# EAGLE board SparkFun_9DoF_Sensor_Stick_Panel_v15a (EAGLE 7.5.0), part 1 of 12
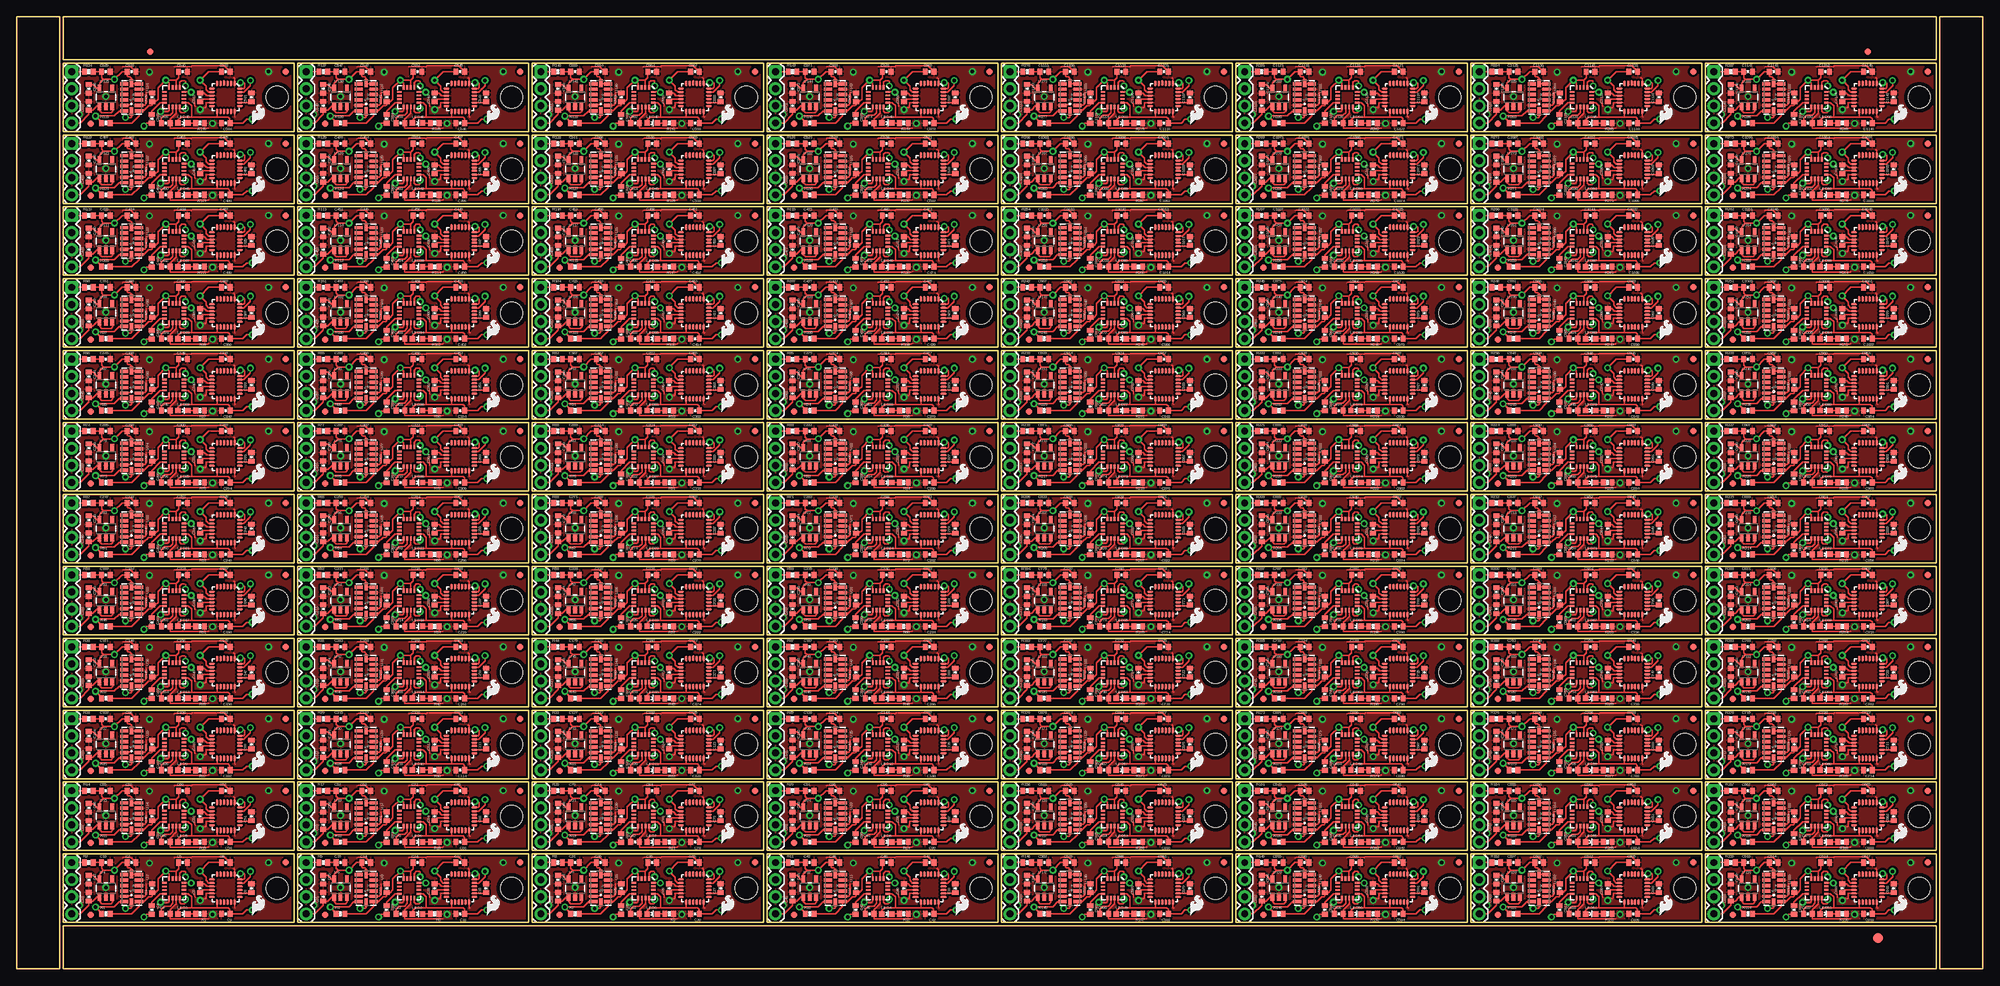
[diagram p0: board, top side]
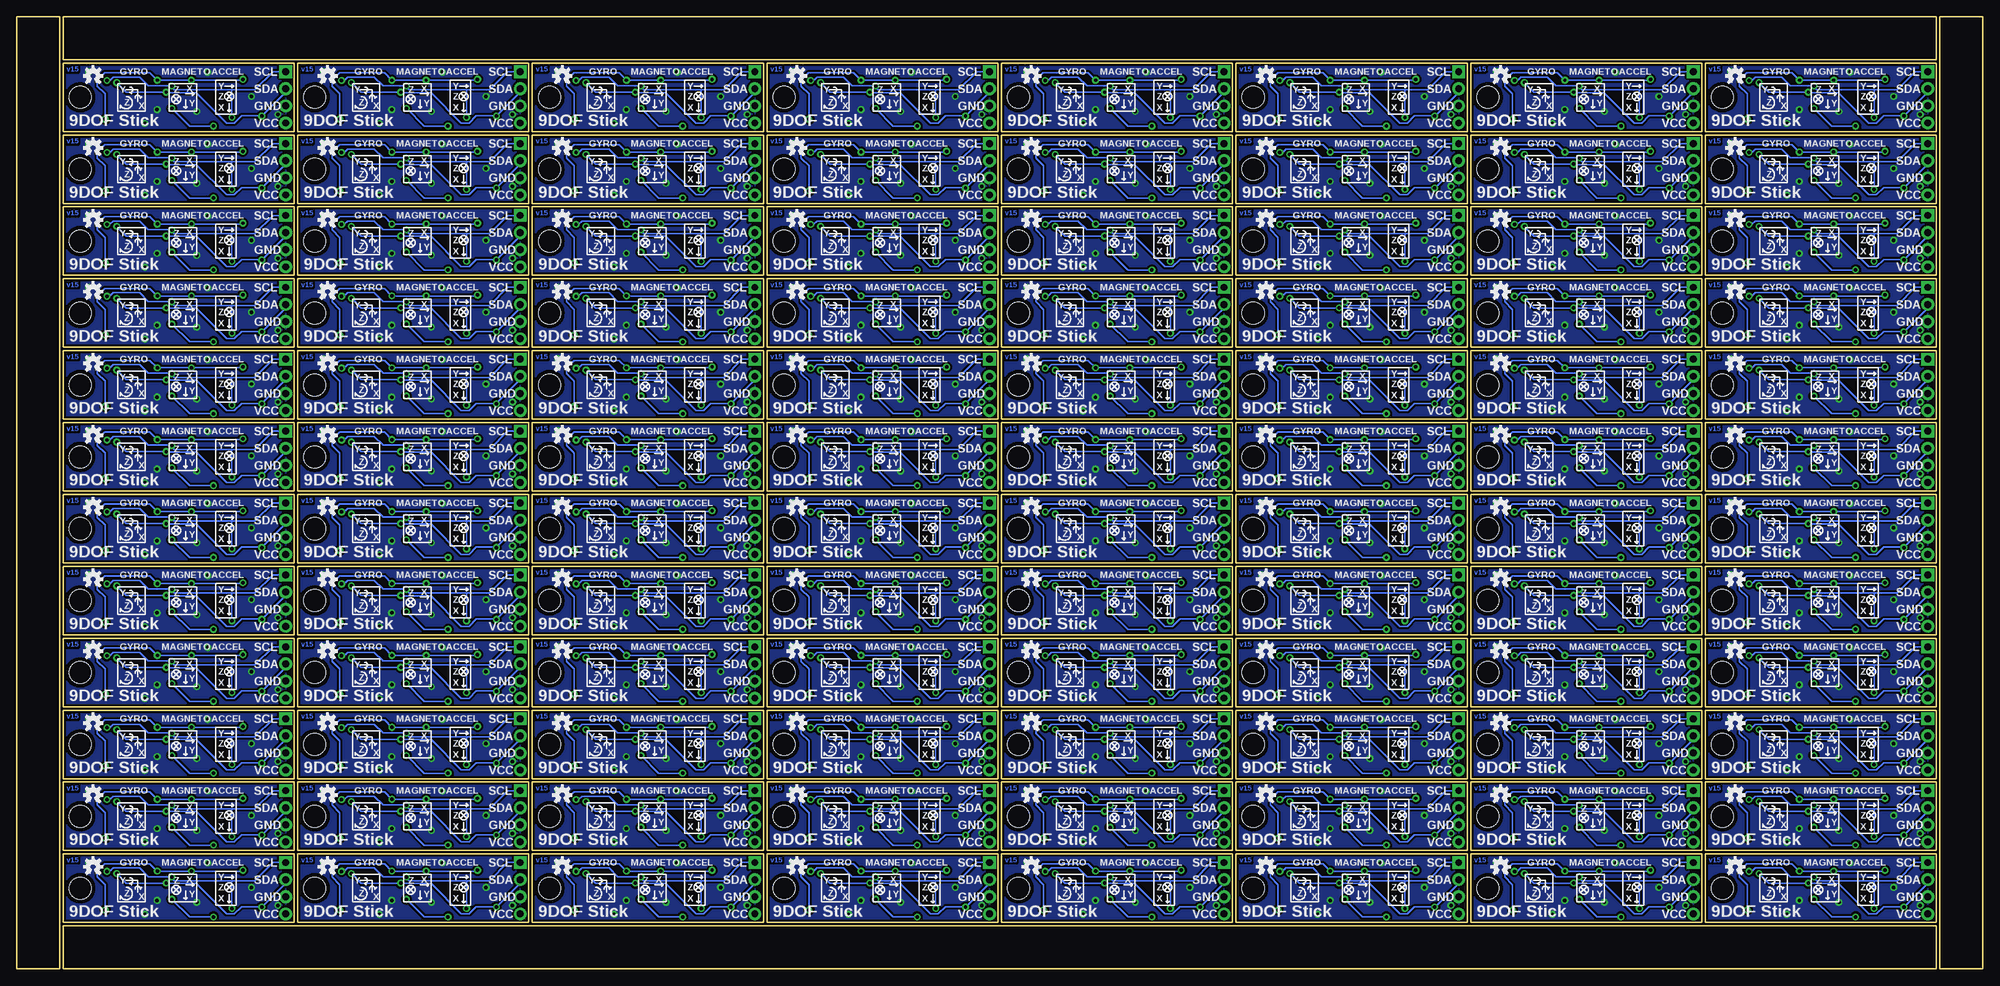
[diagram p1: board, bottom side, seen from below]

Size 291.59 x 141.22 mm. Coordinates in mm from the lower left corner, seen from the top.
Outline: 408 segments
Copper layers (1*16): Top 0.035mm / dielectric 1.5mm / Bottom 0.035mm
Design rules "default": minimum track width 8mil, minimum drill 20mil, track to track 8mil, track to pad 8mil, pad to pad 8mil, via to via 8mil, smd to smd 8mil, copper to edge 8mil, drill to drill 8mil, minimum pad ring 12mil, minimum via ring 10mil, stop-mask expansion 4mil, vias tented up to drill 20mil, thermal gap 10mil
tRestrict: area 32.6,9.8 to 32.7,9.9; area 18,12.7 to 18.2,12.8; area 22.3,10.5 to 22.3,10.5; area 67.4,9.8 to 67.5,9.9; area 52.8,12.7 to 53,12.8; area 57.1,10.5 to 57.1,10.5; area 102.2,9.8 to 102.3,9.9; area 87.6,12.7 to 87.8,12.8; area 91.9,10.5 to 91.9,10.5; area 137,9.8 to 137.1,9.9; area 122.4,12.7 to 122.6,12.8; area 126.7,10.5 to 126.7,10.5; 276 more areas

## Footprints (pad centres in the part's own frame; a part is rotated, then mirrored left to right if it is on the bottom)
0402-CAP = smd 0.7 x 0.9: 1 -0.65,0; 2 0.65,0
FIDUCIAL-1.5X3 = smd 1.5 x 1.5: 1 0,0
FIDUCIAL-1X2 = smd 1 x 1: 1 0,0
1X04 = drill 1.016 pad 1.88 square: 1 0,0 | drill 1.016 pad 1.88: 2 2.54,0; 3 5.08,0; 4 7.62,0
STAND-OFF = hole 3.302: 0,0
LED-0603 = smd 0.8 x 0.8: A 0,-0.75; C 0,0.75
0402-RES = smd 0.7 x 0.9: 1 -0.65,0; 2 0.65,0
QFN-24_1:1 = smd 0.889 x 0.279: 1 -2.076,1.301; 2 -2.076,0.775; 3 -2.076,0.25; 4 -2.102,-0.25; 5 -2.076,-0.775; 6 -2.076,-1.301; 13 2.076,-1.301; 14 2.076,-0.775; 15 2.076,-0.25; 16 2.076,0.25; 17 2.076,0.775; 18 2.076,1.301 | smd 0.279 x 0.889: 7 -1.301,-2.076; 8 -0.775,-2.076; 9 -0.25,-2.076; 10 0.25,-2.076; 11 0.775,-2.076; 12 1.301,-2.076; 19 1.301,2.076; 20 0.775,2.076; 21 0.25,2.076; 22 -0.25,2.076; 23 -0.775,2.076; 24 -1.301,2.076
LGA14 = smd 0.5 x 1.2: 1 2,1.1; 2 1.2,1.1; 3 0.4,1.1; 4 -0.4,1.1; 5 -1.2,1.1; 6 -2,1.1; 8 -2,-1.1; 9 -1.2,-1.1; 10 -0.4,-1.1; 11 0.4,-1.1; 12 1.2,-1.1; 13 2,-1.1 | smd 1.2 x 0.5: 7 -2.1,0; 14 2.1,0
SOT23-5 = smd 0.55 x 1.2: 1 -0.95,-1.3; 2 0,-1.3; 3 0.95,-1.3; 4 0.95,1.3; 5 -0.95,1.3
16LPCC_1:1 = smd 0.65 x 0.28: 1 -1.446,0.801; 2 -1.446,0.25; 3 -1.446,-0.275; 4 -1.446,-0.801; 9 1.446,-0.801; 10 1.446,-0.25; 11 1.446,0.275; 12 1.446,0.801 | smd 0.28 x 0.65: 5 -0.801,-1.446; 6 -0.25,-1.446; 7 0.275,-1.446; 8 0.801,-1.446; 13 0.801,1.446; 14 0.25,1.446; 15 -0.275,1.446; 16 -0.801,1.446

## Placement (x,y rotation side)
C1  0.1uF  [0402-CAP]  20.07,11.94 90 top
C2  0.1uF  [0402-CAP]  17.02,15.75 0 top
C3  4.7uF  [0402-CAP]  22.1,8.13 0 top
C4  0.22uF  [0402-CAP]  20.03,8.74 270 top
C5  0.1uF  [0402-CAP]  24.64,15.75 0 top
C6  2.2nF  [0402-CAP]  34.8,11.94 90 top
C7  0.1uF  [0402-CAP]  27.18,11.94 90 top
C8  10nF  [0402-CAP]  30.99,15.75 0 top
C9  0.1uF  [0402-CAP]  30.99,8.13 180 top
C10  0.1uF  [0402-CAP]  13.21,15.75 0 top
C11  4.7uF  [0402-CAP]  10.67,10.67 90 top
C12  4.7uF  [0402-CAP]  10.67,13.21 270 top
C13  0.1uF  [0402-CAP]  54.86,11.94 90 top
C14  0.1uF  [0402-CAP]  51.82,15.75 0 top
C15  2.2nF  [0402-CAP]  69.6,11.94 90 top
C16  0.1uF  [0402-CAP]  61.98,11.94 90 top
C17  10nF  [0402-CAP]  65.79,15.75 0 top
C18  0.1uF  [0402-CAP]  65.79,8.13 180 top
C19  0.1uF  [0402-CAP]  48.01,15.75 0 top
C20  4.7uF  [0402-CAP]  45.47,13.21 270 top
C21  4.7uF  [0402-CAP]  45.47,10.67 90 top
C22  4.7uF  [0402-CAP]  56.9,8.13 0 top
C23  0.22uF  [0402-CAP]  54.83,8.74 270 top
C24  0.1uF  [0402-CAP]  59.44,15.75 0 top
C25  0.1uF  [0402-CAP]  89.66,11.94 90 top
C26  0.1uF  [0402-CAP]  86.61,15.75 0 top
C27  2.2nF  [0402-CAP]  104.39,11.94 90 top
C28  0.1uF  [0402-CAP]  96.77,11.94 90 top
C29  10nF  [0402-CAP]  100.58,15.75 0 top
C30  0.1uF  [0402-CAP]  100.58,8.13 180 top
C31  0.1uF  [0402-CAP]  82.8,15.75 0 top
C32  4.7uF  [0402-CAP]  80.26,13.21 270 top
C33  4.7uF  [0402-CAP]  80.26,10.67 90 top
C34  4.7uF  [0402-CAP]  91.69,8.13 0 top
C35  0.22uF  [0402-CAP]  89.62,8.74 270 top
C36  0.1uF  [0402-CAP]  94.23,15.75 0 top
C37  0.1uF  [0402-CAP]  124.46,11.94 90 top
C38  0.1uF  [0402-CAP]  121.41,15.75 0 top
C39  2.2nF  [0402-CAP]  139.19,11.94 90 top
C40  0.1uF  [0402-CAP]  131.57,11.94 90 top
C41  10nF  [0402-CAP]  135.38,15.75 0 top
C42  0.1uF  [0402-CAP]  135.38,8.13 180 top
C43  0.1uF  [0402-CAP]  117.6,15.75 0 top
C44  4.7uF  [0402-CAP]  115.06,13.21 270 top
C45  4.7uF  [0402-CAP]  115.06,10.67 90 top
C46  4.7uF  [0402-CAP]  126.49,8.13 0 top
C47  0.22uF  [0402-CAP]  124.42,8.74 270 top
C48  0.1uF  [0402-CAP]  129.03,15.75 0 top
C49  0.1uF  [0402-CAP]  20.07,22.61 90 top
C50  0.1uF  [0402-CAP]  17.02,26.42 0 top
C51  2.2nF  [0402-CAP]  34.8,22.61 90 top
C52  0.1uF  [0402-CAP]  27.18,22.61 90 top
C53  10nF  [0402-CAP]  30.99,26.42 0 top
C54  0.1uF  [0402-CAP]  30.99,18.8 180 top
C55  0.1uF  [0402-CAP]  13.21,26.42 0 top
C56  4.7uF  [0402-CAP]  10.67,23.88 270 top
C57  4.7uF  [0402-CAP]  10.67,21.34 90 top
C58  4.7uF  [0402-CAP]  22.1,18.8 0 top
C59  0.22uF  [0402-CAP]  20.03,19.4 270 top
C60  0.1uF  [0402-CAP]  24.64,26.42 0 top
C61  0.1uF  [0402-CAP]  54.86,22.61 90 top
C62  0.1uF  [0402-CAP]  51.82,26.42 0 top
C63  2.2nF  [0402-CAP]  69.6,22.61 90 top
C64  0.1uF  [0402-CAP]  61.98,22.61 90 top
C65  10nF  [0402-CAP]  65.79,26.42 0 top
C66  0.1uF  [0402-CAP]  65.79,18.8 180 top
C67  0.1uF  [0402-CAP]  48.01,26.42 0 top
C68  4.7uF  [0402-CAP]  45.47,23.88 270 top
C69  4.7uF  [0402-CAP]  45.47,21.34 90 top
C70  4.7uF  [0402-CAP]  56.9,18.8 0 top
C71  0.22uF  [0402-CAP]  54.83,19.4 270 top
C72  0.1uF  [0402-CAP]  59.44,26.42 0 top
C73  0.1uF  [0402-CAP]  89.66,22.61 90 top
C74  0.1uF  [0402-CAP]  86.61,26.42 0 top
C75  2.2nF  [0402-CAP]  104.39,22.61 90 top
C76  0.1uF  [0402-CAP]  96.77,22.61 90 top
C77  10nF  [0402-CAP]  100.58,26.42 0 top
C78  0.1uF  [0402-CAP]  100.58,18.8 180 top
C79  0.1uF  [0402-CAP]  82.8,26.42 0 top
C80  4.7uF  [0402-CAP]  80.26,23.88 270 top
C81  4.7uF  [0402-CAP]  80.26,21.34 90 top
C82  4.7uF  [0402-CAP]  91.69,18.8 0 top
C83  0.22uF  [0402-CAP]  89.62,19.4 270 top
C84  0.1uF  [0402-CAP]  94.23,26.42 0 top
C85  0.1uF  [0402-CAP]  124.46,22.61 90 top
C86  0.1uF  [0402-CAP]  121.41,26.42 0 top
C87  2.2nF  [0402-CAP]  139.19,22.61 90 top
C88  0.1uF  [0402-CAP]  131.57,22.61 90 top
C89  10nF  [0402-CAP]  135.38,26.42 0 top
C90  0.1uF  [0402-CAP]  135.38,18.8 180 top
C91  0.1uF  [0402-CAP]  117.6,26.42 0 top
C92  4.7uF  [0402-CAP]  115.06,23.88 270 top
C93  4.7uF  [0402-CAP]  115.06,21.34 90 top
C94  4.7uF  [0402-CAP]  126.49,18.8 0 top
C95  0.22uF  [0402-CAP]  124.42,19.4 270 top
C96  0.1uF  [0402-CAP]  129.03,26.42 0 top
C97  0.1uF  [0402-CAP]  20.07,33.27 90 top
C98  0.1uF  [0402-CAP]  17.02,37.08 0 top
C99  2.2nF  [0402-CAP]  34.8,33.27 90 top
C100  0.1uF  [0402-CAP]  27.18,33.27 90 top
C101  10nF  [0402-CAP]  30.99,37.08 0 top
C102  0.1uF  [0402-CAP]  30.99,29.46 180 top
C103  0.1uF  [0402-CAP]  13.21,37.08 0 top
C104  4.7uF  [0402-CAP]  10.67,34.54 270 top
C105  4.7uF  [0402-CAP]  10.67,32 90 top
C106  4.7uF  [0402-CAP]  22.1,29.46 0 top
C107  0.22uF  [0402-CAP]  20.03,30.07 270 top
C108  0.1uF  [0402-CAP]  24.64,37.08 0 top
C109  0.1uF  [0402-CAP]  54.86,33.27 90 top
C110  0.1uF  [0402-CAP]  51.82,37.08 0 top
C111  2.2nF  [0402-CAP]  69.6,33.27 90 top
C112  0.1uF  [0402-CAP]  61.98,33.27 90 top
C113  10nF  [0402-CAP]  65.79,37.08 0 top
C114  0.1uF  [0402-CAP]  65.79,29.46 180 top
C115  0.1uF  [0402-CAP]  48.01,37.08 0 top
C116  4.7uF  [0402-CAP]  45.47,34.54 270 top
C117  4.7uF  [0402-CAP]  45.47,32 90 top
C118  4.7uF  [0402-CAP]  56.9,29.46 0 top
C119  0.22uF  [0402-CAP]  54.83,30.07 270 top
C120  0.1uF  [0402-CAP]  59.44,37.08 0 top
C121  0.1uF  [0402-CAP]  89.66,33.27 90 top
C122  0.1uF  [0402-CAP]  86.61,37.08 0 top
C123  2.2nF  [0402-CAP]  104.39,33.27 90 top
C124  0.1uF  [0402-CAP]  96.77,33.27 90 top
C125  10nF  [0402-CAP]  100.58,37.08 0 top
C126  0.1uF  [0402-CAP]  100.58,29.46 180 top
C127  0.1uF  [0402-CAP]  82.8,37.08 0 top
C128  4.7uF  [0402-CAP]  80.26,34.54 270 top
C129  4.7uF  [0402-CAP]  80.26,32 90 top
C130  4.7uF  [0402-CAP]  91.69,29.46 0 top
C131  0.22uF  [0402-CAP]  89.62,30.07 270 top
C132  0.1uF  [0402-CAP]  94.23,37.08 0 top
C133  0.1uF  [0402-CAP]  124.46,33.27 90 top
C134  0.1uF  [0402-CAP]  121.41,37.08 0 top
C135  2.2nF  [0402-CAP]  139.19,33.27 90 top
C136  0.1uF  [0402-CAP]  131.57,33.27 90 top
C137  10nF  [0402-CAP]  135.38,37.08 0 top
C138  0.1uF  [0402-CAP]  135.38,29.46 180 top
C139  0.1uF  [0402-CAP]  117.6,37.08 0 top
C140  4.7uF  [0402-CAP]  115.06,34.54 270 top
C141  4.7uF  [0402-CAP]  115.06,32 90 top
C142  4.7uF  [0402-CAP]  126.49,29.46 0 top
C143  0.22uF  [0402-CAP]  124.42,30.07 270 top
C144  0.1uF  [0402-CAP]  129.03,37.08 0 top
C145  0.1uF  [0402-CAP]  20.07,43.94 90 top
C146  0.1uF  [0402-CAP]  17.02,47.75 0 top
C147  2.2nF  [0402-CAP]  34.8,43.94 90 top
C148  0.1uF  [0402-CAP]  27.18,43.94 90 top
C149  10nF  [0402-CAP]  30.99,47.75 0 top
C150  0.1uF  [0402-CAP]  30.99,40.13 180 top
C151  0.1uF  [0402-CAP]  13.21,47.75 0 top
C152  4.7uF  [0402-CAP]  10.67,45.21 270 top
C153  4.7uF  [0402-CAP]  10.67,42.67 90 top
C154  4.7uF  [0402-CAP]  22.1,40.13 0 top
C155  0.22uF  [0402-CAP]  20.03,40.74 270 top
C156  0.1uF  [0402-CAP]  24.64,47.75 0 top
C157  0.1uF  [0402-CAP]  54.86,43.94 90 top
C158  0.1uF  [0402-CAP]  51.82,47.75 0 top
C159  2.2nF  [0402-CAP]  69.6,43.94 90 top
C160  0.1uF  [0402-CAP]  61.98,43.94 90 top
C161  10nF  [0402-CAP]  65.79,47.75 0 top
C162  0.1uF  [0402-CAP]  65.79,40.13 180 top
C163  0.1uF  [0402-CAP]  48.01,47.75 0 top
C164  4.7uF  [0402-CAP]  45.47,45.21 270 top
C165  4.7uF  [0402-CAP]  45.47,42.67 90 top
C166  4.7uF  [0402-CAP]  56.9,40.13 0 top
C167  0.22uF  [0402-CAP]  54.83,40.74 270 top
C168  0.1uF  [0402-CAP]  59.44,47.75 0 top
C169  0.1uF  [0402-CAP]  89.66,43.94 90 top
C170  0.1uF  [0402-CAP]  86.61,47.75 0 top
C171  2.2nF  [0402-CAP]  104.39,43.94 90 top
C172  0.1uF  [0402-CAP]  96.77,43.94 90 top
C173  10nF  [0402-CAP]  100.58,47.75 0 top
C174  0.1uF  [0402-CAP]  100.58,40.13 180 top
C175  0.1uF  [0402-CAP]  82.8,47.75 0 top
C176  4.7uF  [0402-CAP]  80.26,45.21 270 top
C177  4.7uF  [0402-CAP]  80.26,42.67 90 top
C178  4.7uF  [0402-CAP]  91.69,40.13 0 top
C179  0.22uF  [0402-CAP]  89.62,40.74 270 top
C180  0.1uF  [0402-CAP]  94.23,47.75 0 top
C181  0.1uF  [0402-CAP]  124.46,43.94 90 top
C182  0.1uF  [0402-CAP]  121.41,47.75 0 top
C183  2.2nF  [0402-CAP]  139.19,43.94 90 top
C184  0.1uF  [0402-CAP]  131.57,43.94 90 top
C185  10nF  [0402-CAP]  135.38,47.75 0 top
C186  0.1uF  [0402-CAP]  135.38,40.13 180 top
C187  0.1uF  [0402-CAP]  117.6,47.75 0 top
C188  4.7uF  [0402-CAP]  115.06,45.21 270 top
C189  4.7uF  [0402-CAP]  115.06,42.67 90 top
C190  4.7uF  [0402-CAP]  126.49,40.13 0 top
C191  0.22uF  [0402-CAP]  124.42,40.74 270 top
C192  0.1uF  [0402-CAP]  129.03,47.75 0 top
C193  0.1uF  [0402-CAP]  20.07,54.61 90 top
C194  0.1uF  [0402-CAP]  17.02,58.42 0 top
C195  2.2nF  [0402-CAP]  34.8,54.61 90 top
C196  0.1uF  [0402-CAP]  27.18,54.61 90 top
C197  10nF  [0402-CAP]  30.99,58.42 0 top
C198  0.1uF  [0402-CAP]  30.99,50.8 180 top
C199  0.1uF  [0402-CAP]  13.21,58.42 0 top
C200  4.7uF  [0402-CAP]  10.67,55.88 270 top
C201  4.7uF  [0402-CAP]  10.67,53.34 90 top
C202  4.7uF  [0402-CAP]  22.1,50.8 0 top
C203  0.22uF  [0402-CAP]  20.03,51.41 270 top
C204  0.1uF  [0402-CAP]  24.64,58.42 0 top
C205  0.1uF  [0402-CAP]  54.86,54.61 90 top
C206  0.1uF  [0402-CAP]  51.82,58.42 0 top
C207  2.2nF  [0402-CAP]  69.6,54.61 90 top
C208  0.1uF  [0402-CAP]  61.98,54.61 90 top
C209  10nF  [0402-CAP]  65.79,58.42 0 top
C210  0.1uF  [0402-CAP]  65.79,50.8 180 top
C211  0.1uF  [0402-CAP]  48.01,58.42 0 top
C212  4.7uF  [0402-CAP]  45.47,55.88 270 top
C213  4.7uF  [0402-CAP]  45.47,53.34 90 top
C214  4.7uF  [0402-CAP]  56.9,50.8 0 top
C215  0.22uF  [0402-CAP]  54.83,51.41 270 top
C216  0.1uF  [0402-CAP]  59.44,58.42 0 top
C217  0.1uF  [0402-CAP]  89.66,54.61 90 top
C218  0.1uF  [0402-CAP]  86.61,58.42 0 top
C219  2.2nF  [0402-CAP]  104.39,54.61 90 top
C220  0.1uF  [0402-CAP]  96.77,54.61 90 top
C221  10nF  [0402-CAP]  100.58,58.42 0 top
C222  0.1uF  [0402-CAP]  100.58,50.8 180 top
C223  0.1uF  [0402-CAP]  82.8,58.42 0 top
C224  4.7uF  [0402-CAP]  80.26,55.88 270 top
C225  4.7uF  [0402-CAP]  80.26,53.34 90 top
C226  4.7uF  [0402-CAP]  91.69,50.8 0 top
C227  0.22uF  [0402-CAP]  89.62,51.41 270 top
C228  0.1uF  [0402-CAP]  94.23,58.42 0 top
C229  0.1uF  [0402-CAP]  124.46,54.61 90 top
C230  0.1uF  [0402-CAP]  121.41,58.42 0 top
C231  2.2nF  [0402-CAP]  139.19,54.61 90 top
C232  0.1uF  [0402-CAP]  131.57,54.61 90 top
C233  10nF  [0402-CAP]  135.38,58.42 0 top
C234  0.1uF  [0402-CAP]  135.38,50.8 180 top
C235  0.1uF  [0402-CAP]  117.6,58.42 0 top
C236  4.7uF  [0402-CAP]  115.06,55.88 270 top
C237  4.7uF  [0402-CAP]  115.06,53.34 90 top
C238  4.7uF  [0402-CAP]  126.49,50.8 0 top
C239  0.22uF  [0402-CAP]  124.42,51.41 270 top
C240  0.1uF  [0402-CAP]  129.03,58.42 0 top
C241  0.1uF  [0402-CAP]  20.07,65.28 90 top
C242  0.1uF  [0402-CAP]  17.02,69.09 0 top
C243  2.2nF  [0402-CAP]  34.8,65.28 90 top
C244  0.1uF  [0402-CAP]  27.18,65.28 90 top
C245  10nF  [0402-CAP]  30.99,69.09 0 top
C246  0.1uF  [0402-CAP]  30.99,61.47 180 top
C247  0.1uF  [0402-CAP]  13.21,69.09 0 top
C248  4.7uF  [0402-CAP]  10.67,66.55 270 top
C249  4.7uF  [0402-CAP]  10.67,64.01 90 top
C250  4.7uF  [0402-CAP]  22.1,61.47 0 top
C251  0.22uF  [0402-CAP]  20.03,62.08 270 top
C252  0.1uF  [0402-CAP]  24.64,69.09 0 top
C253  0.1uF  [0402-CAP]  54.86,65.28 90 top
C254  0.1uF  [0402-CAP]  51.82,69.09 0 top
C255  2.2nF  [0402-CAP]  69.6,65.28 90 top
C256  0.1uF  [0402-CAP]  61.98,65.28 90 top
C257  10nF  [0402-CAP]  65.79,69.09 0 top
C258  0.1uF  [0402-CAP]  65.79,61.47 180 top
C259  0.1uF  [0402-CAP]  48.01,69.09 0 top
C260  4.7uF  [0402-CAP]  45.47,66.55 270 top
C261  4.7uF  [0402-CAP]  45.47,64.01 90 top
C262  4.7uF  [0402-CAP]  56.9,61.47 0 top
C263  0.22uF  [0402-CAP]  54.83,62.08 270 top
C264  0.1uF  [0402-CAP]  59.44,69.09 0 top
C265  0.1uF  [0402-CAP]  89.66,65.28 90 top
C266  0.1uF  [0402-CAP]  86.61,69.09 0 top
C267  2.2nF  [0402-CAP]  104.39,65.28 90 top
C268  0.1uF  [0402-CAP]  96.77,65.28 90 top
C269  10nF  [0402-CAP]  100.58,69.09 0 top
C270  0.1uF  [0402-CAP]  100.58,61.47 180 top
C271  0.1uF  [0402-CAP]  82.8,69.09 0 top
C272  4.7uF  [0402-CAP]  80.26,66.55 270 top
C273  4.7uF  [0402-CAP]  80.26,64.01 90 top
C274  4.7uF  [0402-CAP]  91.69,61.47 0 top
C275  0.22uF  [0402-CAP]  89.62,62.08 270 top
C276  0.1uF  [0402-CAP]  94.23,69.09 0 top
C277  0.1uF  [0402-CAP]  124.46,65.28 90 top
C278  0.1uF  [0402-CAP]  121.41,69.09 0 top
C279  2.2nF  [0402-CAP]  139.19,65.28 90 top
C280  0.1uF  [0402-CAP]  131.57,65.28 90 top
C281  10nF  [0402-CAP]  135.38,69.09 0 top
C282  0.1uF  [0402-CAP]  135.38,61.47 180 top
C283  0.1uF  [0402-CAP]  117.6,69.09 0 top
C284  4.7uF  [0402-CAP]  115.06,66.55 270 top
C285  4.7uF  [0402-CAP]  115.06,64.01 90 top
C286  4.7uF  [0402-CAP]  126.49,61.47 0 top
C287  0.22uF  [0402-CAP]  124.42,62.08 270 top
C288  0.1uF  [0402-CAP]  129.03,69.09 0 top
C289  0.1uF  [0402-CAP]  20.07,75.95 90 top
C290  0.1uF  [0402-CAP]  17.02,79.76 0 top
C291  2.2nF  [0402-CAP]  34.8,75.95 90 top
C292  0.1uF  [0402-CAP]  27.18,75.95 90 top
C293  10nF  [0402-CAP]  30.99,79.76 0 top
C294  0.1uF  [0402-CAP]  30.99,72.14 180 top
C295  0.1uF  [0402-CAP]  13.21,79.76 0 top
C296  4.7uF  [0402-CAP]  10.67,77.22 270 top
C297  4.7uF  [0402-CAP]  10.67,74.68 90 top
C298  4.7uF  [0402-CAP]  22.1,72.14 0 top
C299  0.22uF  [0402-CAP]  20.03,72.74 270 top
C300  0.1uF  [0402-CAP]  24.64,79.76 0 top
C301  0.1uF  [0402-CAP]  54.86,75.95 90 top
C302  0.1uF  [0402-CAP]  51.82,79.76 0 top
C303  2.2nF  [0402-CAP]  69.6,75.95 90 top
C304  0.1uF  [0402-CAP]  61.98,75.95 90 top
C305  10nF  [0402-CAP]  65.79,79.76 0 top
C306  0.1uF  [0402-CAP]  65.79,72.14 180 top
C307  0.1uF  [0402-CAP]  48.01,79.76 0 top
C308  4.7uF  [0402-CAP]  45.47,77.22 270 top
C309  4.7uF  [0402-CAP]  45.47,74.68 90 top
C310  4.7uF  [0402-CAP]  56.9,72.14 0 top
C311  0.22uF  [0402-CAP]  54.83,72.74 270 top
C312  0.1uF  [0402-CAP]  59.44,79.76 0 top
C313  0.1uF  [0402-CAP]  89.66,75.95 90 top
C314  0.1uF  [0402-CAP]  86.61,79.76 0 top
C315  2.2nF  [0402-CAP]  104.39,75.95 90 top
C316  0.1uF  [0402-CAP]  96.77,75.95 90 top
C317  10nF  [0402-CAP]  100.58,79.76 0 top
C318  0.1uF  [0402-CAP]  100.58,72.14 180 top
C319  0.1uF  [0402-CAP]  82.8,79.76 0 top
C320  4.7uF  [0402-CAP]  80.26,77.22 270 top
C321  4.7uF  [0402-CAP]  80.26,74.68 90 top
C322  4.7uF  [0402-CAP]  91.69,72.14 0 top
C323  0.22uF  [0402-CAP]  89.62,72.74 270 top
C324  0.1uF  [0402-CAP]  94.23,79.76 0 top
C325  0.1uF  [0402-CAP]  124.46,75.95 90 top
C326  0.1uF  [0402-CAP]  121.41,79.76 0 top
C327  2.2nF  [0402-CAP]  139.19,75.95 90 top
C328  0.1uF  [0402-CAP]  131.57,75.95 90 top
C329  10nF  [0402-CAP]  135.38,79.76 0 top
C330  0.1uF  [0402-CAP]  135.38,72.14 180 top
C331  0.1uF  [0402-CAP]  117.6,79.76 0 top
C332  4.7uF  [0402-CAP]  115.06,77.22 270 top
C333  4.7uF  [0402-CAP]  115.06,74.68 90 top
C334  4.7uF  [0402-CAP]  126.49,72.14 0 top
C335  0.22uF  [0402-CAP]  124.42,72.74 270 top
C336  0.1uF  [0402-CAP]  129.03,79.76 0 top
C337  0.1uF  [0402-CAP]  20.07,86.61 90 top
C338  0.1uF  [0402-CAP]  17.02,90.42 0 top
C339  2.2nF  [0402-CAP]  34.8,86.61 90 top
C340  0.1uF  [0402-CAP]  27.18,86.61 90 top
C341  10nF  [0402-CAP]  30.99,90.42 0 top
C342  0.1uF  [0402-CAP]  30.99,82.8 180 top
C343  0.1uF  [0402-CAP]  13.21,90.42 0 top
C344  4.7uF  [0402-CAP]  10.67,87.88 270 top
C345  4.7uF  [0402-CAP]  10.67,85.34 90 top
C346  4.7uF  [0402-CAP]  22.1,82.8 0 top
C347  0.22uF  [0402-CAP]  20.03,83.41 270 top
C348  0.1uF  [0402-CAP]  24.64,90.42 0 top
C349  0.1uF  [0402-CAP]  54.86,86.61 90 top
C350  0.1uF  [0402-CAP]  51.82,90.42 0 top
C351  2.2nF  [0402-CAP]  69.6,86.61 90 top
C352  0.1uF  [0402-CAP]  61.98,86.61 90 top
C353  10nF  [0402-CAP]  65.79,90.42 0 top
C354  0.1uF  [0402-CAP]  65.79,82.8 180 top
C355  0.1uF  [0402-CAP]  48.01,90.42 0 top
C356  4.7uF  [0402-CAP]  45.47,87.88 270 top
C357  4.7uF  [0402-CAP]  45.47,85.34 90 top
C358  4.7uF  [0402-CAP]  56.9,82.8 0 top
C359  0.22uF  [0402-CAP]  54.83,83.41 270 top
C360  0.1uF  [0402-CAP]  59.44,90.42 0 top
C361  0.1uF  [0402-CAP]  89.66,86.61 90 top
C362  0.1uF  [0402-CAP]  86.61,90.42 0 top
C363  2.2nF  [0402-CAP]  104.39,86.61 90 top
C364  0.1uF  [0402-CAP]  96.77,86.61 90 top
C365  10nF  [0402-CAP]  100.58,90.42 0 top
C366  0.1uF  [0402-CAP]  100.58,82.8 180 top
C367  0.1uF  [0402-CAP]  82.8,90.42 0 top
C368  4.7uF  [0402-CAP]  80.26,87.88 270 top
C369  4.7uF  [0402-CAP]  80.26,85.34 90 top
C370  4.7uF  [0402-CAP]  91.69,82.8 0 top
C371  0.22uF  [0402-CAP]  89.62,83.41 270 top
C372  0.1uF  [0402-CAP]  94.23,90.42 0 top
C373  0.1uF  [0402-CAP]  124.46,86.61 90 top
C374  0.1uF  [0402-CAP]  121.41,90.42 0 top
C375  2.2nF  [0402-CAP]  139.19,86.61 90 top
C376  0.1uF  [0402-CAP]  131.57,86.61 90 top
C377  10nF  [0402-CAP]  135.38,90.42 0 top
C378  0.1uF  [0402-CAP]  135.38,82.8 180 top
C379  0.1uF  [0402-CAP]  117.6,90.42 0 top
C380  4.7uF  [0402-CAP]  115.06,87.88 270 top
C381  4.7uF  [0402-CAP]  115.06,85.34 90 top
C382  4.7uF  [0402-CAP]  126.49,82.8 0 top
C383  0.22uF  [0402-CAP]  124.42,83.41 270 top
C384  0.1uF  [0402-CAP]  129.03,90.42 0 top
C385  0.1uF  [0402-CAP]  20.07,97.28 90 top
C386  0.1uF  [0402-CAP]  17.02,101.09 0 top
C387  2.2nF  [0402-CAP]  34.8,97.28 90 top
C388  0.1uF  [0402-CAP]  27.18,97.28 90 top
C389  10nF  [0402-CAP]  30.99,101.09 0 top
C390  0.1uF  [0402-CAP]  30.99,93.47 180 top
C391  0.1uF  [0402-CAP]  13.21,101.09 0 top
C392  4.7uF  [0402-CAP]  10.67,98.55 270 top
C393  4.7uF  [0402-CAP]  10.67,96.01 90 top
C394  4.7uF  [0402-CAP]  22.1,93.47 0 top
C395  0.22uF  [0402-CAP]  20.03,94.08 270 top
C396  0.1uF  [0402-CAP]  24.64,101.09 0 top
C397  0.1uF  [0402-CAP]  54.86,97.28 90 top
C398  0.1uF  [0402-CAP]  51.82,101.09 0 top
C399  2.2nF  [0402-CAP]  69.6,97.28 90 top
C400  0.1uF  [0402-CAP]  61.98,97.28 90 top
C401  10nF  [0402-CAP]  65.79,101.09 0 top
C402  0.1uF  [0402-CAP]  65.79,93.47 180 top
C403  0.1uF  [0402-CAP]  48.01,101.09 0 top
C404  4.7uF  [0402-CAP]  45.47,98.55 270 top
C405  4.7uF  [0402-CAP]  45.47,96.01 90 top
C406  4.7uF  [0402-CAP]  56.9,93.47 0 top
C407  0.22uF  [0402-CAP]  54.83,94.08 270 top
C408  0.1uF  [0402-CAP]  59.44,101.09 0 top
C409  0.1uF  [0402-CAP]  89.66,97.28 90 top
C410  0.1uF  [0402-CAP]  86.61,101.09 0 top
C411  2.2nF  [0402-CAP]  104.39,97.28 90 top
C412  0.1uF  [0402-CAP]  96.77,97.28 90 top
C413  10nF  [0402-CAP]  100.58,101.09 0 top
C414  0.1uF  [0402-CAP]  100.58,93.47 180 top
C415  0.1uF  [0402-CAP]  82.8,101.09 0 top
C416  4.7uF  [0402-CAP]  80.26,98.55 270 top
C417  4.7uF  [0402-CAP]  80.26,96.01 90 top
C418  4.7uF  [0402-CAP]  91.69,93.47 0 top
C419  0.22uF  [0402-CAP]  89.62,94.08 270 top
C420  0.1uF  [0402-CAP]  94.23,101.09 0 top
C421  0.1uF  [0402-CAP]  124.46,97.28 90 top
C422  0.1uF  [0402-CAP]  121.41,101.09 0 top
C423  2.2nF  [0402-CAP]  139.19,97.28 90 top
C424  0.1uF  [0402-CAP]  131.57,97.28 90 top
C425  10nF  [0402-CAP]  135.38,101.09 0 top
C426  0.1uF  [0402-CAP]  135.38,93.47 180 top
C427  0.1uF  [0402-CAP]  117.6,101.09 0 top
C428  4.7uF  [0402-CAP]  115.06,98.55 270 top
C429  4.7uF  [0402-CAP]  115.06,96.01 90 top
C430  4.7uF  [0402-CAP]  126.49,93.47 0 top
C431  0.22uF  [0402-CAP]  124.42,94.08 270 top
C432  0.1uF  [0402-CAP]  129.03,101.09 0 top
C433  0.1uF  [0402-CAP]  20.07,107.95 90 top
C434  0.1uF  [0402-CAP]  17.02,111.76 0 top
C435  2.2nF  [0402-CAP]  34.8,107.95 90 top
C436  0.1uF  [0402-CAP]  27.18,107.95 90 top
C437  10nF  [0402-CAP]  30.99,111.76 0 top
C438  0.1uF  [0402-CAP]  30.99,104.14 180 top
C439  0.1uF  [0402-CAP]  13.21,111.76 0 top
C440  4.7uF  [0402-CAP]  10.67,109.22 270 top
C441  4.7uF  [0402-CAP]  10.67,106.68 90 top
C442  4.7uF  [0402-CAP]  22.1,104.14 0 top
C443  0.22uF  [0402-CAP]  20.03,104.75 270 top
C444  0.1uF  [0402-CAP]  24.64,111.76 0 top
C445  0.1uF  [0402-CAP]  54.86,107.95 90 top
C446  0.1uF  [0402-CAP]  51.82,111.76 0 top
C447  2.2nF  [0402-CAP]  69.6,107.95 90 top
C448  0.1uF  [0402-CAP]  61.98,107.95 90 top
C449  10nF  [0402-CAP]  65.79,111.76 0 top
C450  0.1uF  [0402-CAP]  65.79,104.14 180 top
C451  0.1uF  [0402-CAP]  48.01,111.76 0 top
C452  4.7uF  [0402-CAP]  45.47,109.22 270 top
C453  4.7uF  [0402-CAP]  45.47,106.68 90 top
C454  4.7uF  [0402-CAP]  56.9,104.14 0 top
C455  0.22uF  [0402-CAP]  54.83,104.75 270 top
C456  0.1uF  [0402-CAP]  59.44,111.76 0 top
C457  0.1uF  [0402-CAP]  89.66,107.95 90 top
C458  0.1uF  [0402-CAP]  86.61,111.76 0 top
C459  2.2nF  [0402-CAP]  104.39,107.95 90 top
C460  0.1uF  [0402-CAP]  96.77,107.95 90 top
C461  10nF  [0402-CAP]  100.58,111.76 0 top
C462  0.1uF  [0402-CAP]  100.58,104.14 180 top
C463  0.1uF  [0402-CAP]  82.8,111.76 0 top
C464  4.7uF  [0402-CAP]  80.26,109.22 270 top
C465  4.7uF  [0402-CAP]  80.26,106.68 90 top
C466  4.7uF  [0402-CAP]  91.69,104.14 0 top
C467  0.22uF  [0402-CAP]  89.62,104.75 270 top
C468  0.1uF  [0402-CAP]  94.23,111.76 0 top
C469  0.1uF  [0402-CAP]  124.46,107.95 90 top
C470  0.1uF  [0402-CAP]  121.41,111.76 0 top
C471  2.2nF  [0402-CAP]  139.19,107.95 90 top
C472  0.1uF  [0402-CAP]  131.57,107.95 90 top
C473  10nF  [0402-CAP]  135.38,111.76 0 top
C474  0.1uF  [0402-CAP]  135.38,104.14 180 top
C475  0.1uF  [0402-CAP]  117.6,111.76 0 top
C476  4.7uF  [0402-CAP]  115.06,109.22 270 top
C477  4.7uF  [0402-CAP]  115.06,106.68 90 top
C478  4.7uF  [0402-CAP]  126.49,104.14 0 top
C479  0.22uF  [0402-CAP]  124.42,104.75 270 top
C480  0.1uF  [0402-CAP]  129.03,111.76 0 top
C481  0.1uF  [0402-CAP]  20.07,118.62 90 top
C482  0.1uF  [0402-CAP]  17.02,122.43 0 top
C483  2.2nF  [0402-CAP]  34.8,118.62 90 top
C484  0.1uF  [0402-CAP]  27.18,118.62 90 top
C485  10nF  [0402-CAP]  30.99,122.43 0 top
C486  0.1uF  [0402-CAP]  30.99,114.81 180 top
C487  0.1uF  [0402-CAP]  13.21,122.43 0 top
C488  4.7uF  [0402-CAP]  10.67,119.89 270 top
C489  4.7uF  [0402-CAP]  10.67,117.35 90 top
C490  4.7uF  [0402-CAP]  22.1,114.81 0 top
C491  0.22uF  [0402-CAP]  20.03,115.42 270 top
C492  0.1uF  [0402-CAP]  24.64,122.43 0 top
C493  0.1uF  [0402-CAP]  54.86,118.62 90 top
C494  0.1uF  [0402-CAP]  51.82,122.43 0 top
C495  2.2nF  [0402-CAP]  69.6,118.62 90 top
C496  0.1uF  [0402-CAP]  61.98,118.62 90 top
C497  10nF  [0402-CAP]  65.79,122.43 0 top
C498  0.1uF  [0402-CAP]  65.79,114.81 180 top
C499  0.1uF  [0402-CAP]  48.01,122.43 0 top
C500  4.7uF  [0402-CAP]  45.47,119.89 270 top
C501  4.7uF  [0402-CAP]  45.47,117.35 90 top
C502  4.7uF  [0402-CAP]  56.9,114.81 0 top
C503  0.22uF  [0402-CAP]  54.83,115.42 270 top
C504  0.1uF  [0402-CAP]  59.44,122.43 0 top
C505  0.1uF  [0402-CAP]  89.66,118.62 90 top
C506  0.1uF  [0402-CAP]  86.61,122.43 0 top
C507  2.2nF  [0402-CAP]  104.39,118.62 90 top
C508  0.1uF  [0402-CAP]  96.77,118.62 90 top
C509  10nF  [0402-CAP]  100.58,122.43 0 top
C510  0.1uF  [0402-CAP]  100.58,114.81 180 top
C511  0.1uF  [0402-CAP]  82.8,122.43 0 top
C512  4.7uF  [0402-CAP]  80.26,119.89 270 top
C513  4.7uF  [0402-CAP]  80.26,117.35 90 top
C514  4.7uF  [0402-CAP]  91.69,114.81 0 top
C515  0.22uF  [0402-CAP]  89.62,115.42 270 top
C516  0.1uF  [0402-CAP]  94.23,122.43 0 top
C517  0.1uF  [0402-CAP]  124.46,118.62 90 top
C518  0.1uF  [0402-CAP]  121.41,122.43 0 top
C519  2.2nF  [0402-CAP]  139.19,118.62 90 top
C520  0.1uF  [0402-CAP]  131.57,118.62 90 top
C521  10nF  [0402-CAP]  135.38,122.43 0 top
C522  0.1uF  [0402-CAP]  135.38,114.81 180 top
C523  0.1uF  [0402-CAP]  117.6,122.43 0 top
C524  4.7uF  [0402-CAP]  115.06,119.89 270 top
C525  4.7uF  [0402-CAP]  115.06,117.35 90 top
C526  4.7uF  [0402-CAP]  126.49,114.81 0 top
C527  0.22uF  [0402-CAP]  124.42,115.42 270 top
C528  0.1uF  [0402-CAP]  129.03,122.43 0 top
C529  0.1uF  [0402-CAP]  20.07,129.29 90 top
C530  0.1uF  [0402-CAP]  17.02,133.1 0 top
C531  2.2nF  [0402-CAP]  34.8,129.29 90 top
C532  0.1uF  [0402-CAP]  27.18,129.29 90 top
C533  10nF  [0402-CAP]  30.99,133.1 0 top
C534  0.1uF  [0402-CAP]  30.99,125.48 180 top
C535  0.1uF  [0402-CAP]  13.21,133.1 0 top
C536  4.7uF  [0402-CAP]  10.67,130.56 270 top
C537  4.7uF  [0402-CAP]  10.67,128.02 90 top
C538  4.7uF  [0402-CAP]  22.1,125.48 0 top
C539  0.22uF  [0402-CAP]  20.03,126.08 270 top
C540  0.1uF  [0402-CAP]  24.64,133.1 0 top
C541  0.1uF  [0402-CAP]  54.86,129.29 90 top
C542  0.1uF  [0402-CAP]  51.82,133.1 0 top
C543  2.2nF  [0402-CAP]  69.6,129.29 90 top
C544  0.1uF  [0402-CAP]  61.98,129.29 90 top
C545  10nF  [0402-CAP]  65.79,133.1 0 top
C546  0.1uF  [0402-CAP]  65.79,125.48 180 top
C547  0.1uF  [0402-CAP]  48.01,133.1 0 top
C548  4.7uF  [0402-CAP]  45.47,130.56 270 top
C549  4.7uF  [0402-CAP]  45.47,128.02 90 top
C550  4.7uF  [0402-CAP]  56.9,125.48 0 top
C551  0.22uF  [0402-CAP]  54.83,126.08 270 top
C552  0.1uF  [0402-CAP]  59.44,133.1 0 top
C553  0.1uF  [0402-CAP]  89.66,129.29 90 top
C554  0.1uF  [0402-CAP]  86.61,133.1 0 top
C555  2.2nF  [0402-CAP]  104.39,129.29 90 top
C556  0.1uF  [0402-CAP]  96.77,129.29 90 top
C557  10nF  [0402-CAP]  100.58,133.1 0 top
C558  0.1uF  [0402-CAP]  100.58,125.48 180 top
C559  0.1uF  [0402-CAP]  82.8,133.1 0 top
C560  4.7uF  [0402-CAP]  80.26,130.56 270 top
C561  4.7uF  [0402-CAP]  80.26,128.02 90 top
C562  4.7uF  [0402-CAP]  91.69,125.48 0 top
C563  0.22uF  [0402-CAP]  89.62,126.08 270 top
C564  0.1uF  [0402-CAP]  94.23,133.1 0 top
C565  0.1uF  [0402-CAP]  124.46,129.29 90 top
C566  0.1uF  [0402-CAP]  121.41,133.1 0 top
C567  2.2nF  [0402-CAP]  139.19,129.29 90 top
C568  0.1uF  [0402-CAP]  131.57,129.29 90 top
C569  10nF  [0402-CAP]  135.38,133.1 0 top
C570  0.1uF  [0402-CAP]  135.38,125.48 180 top
C571  0.1uF  [0402-CAP]  117.6,133.1 0 top
C572  4.7uF  [0402-CAP]  115.06,130.56 270 top
C573  4.7uF  [0402-CAP]  115.06,128.02 90 top
C574  4.7uF  [0402-CAP]  126.49,125.48 0 top
C575  0.22uF  [0402-CAP]  124.42,126.08 270 top
C576  0.1uF  [0402-CAP]  129.03,133.1 0 top
C577  0.1uF  [0402-CAP]  159.26,11.94 90 top
C578  0.1uF  [0402-CAP]  156.21,15.75 0 top
C579  2.2nF  [0402-CAP]  173.99,11.94 90 top
C580  0.1uF  [0402-CAP]  166.37,11.94 90 top
C581  10nF  [0402-CAP]  170.18,15.75 0 top
C582  0.1uF  [0402-CAP]  170.18,8.13 180 top
C583  0.1uF  [0402-CAP]  152.4,15.75 0 top
C584  4.7uF  [0402-CAP]  149.86,13.21 270 top
C585  4.7uF  [0402-CAP]  149.86,10.67 90 top
C586  4.7uF  [0402-CAP]  161.29,8.13 0 top
C587  0.22uF  [0402-CAP]  159.22,8.74 270 top
C588  0.1uF  [0402-CAP]  163.83,15.75 0 top
C589  0.1uF  [0402-CAP]  194.06,11.94 90 top
C590  0.1uF  [0402-CAP]  191.01,15.75 0 top
C591  2.2nF  [0402-CAP]  208.79,11.94 90 top
C592  0.1uF  [0402-CAP]  201.17,11.94 90 top
C593  10nF  [0402-CAP]  204.98,15.75 0 top
C594  0.1uF  [0402-CAP]  204.98,8.13 180 top
C595  0.1uF  [0402-CAP]  187.2,15.75 0 top
C596  4.7uF  [0402-CAP]  184.66,13.21 270 top
C597  4.7uF  [0402-CAP]  184.66,10.67 90 top
C598  4.7uF  [0402-CAP]  196.09,8.13 0 top
C599  0.22uF  [0402-CAP]  194.02,8.74 270 top
C600  0.1uF  [0402-CAP]  198.63,15.75 0 top
C601  0.1uF  [0402-CAP]  228.85,11.94 90 top
C602  0.1uF  [0402-CAP]  225.81,15.75 0 top
C603  2.2nF  [0402-CAP]  243.59,11.94 90 top
C604  0.1uF  [0402-CAP]  235.97,11.94 90 top
C605  10nF  [0402-CAP]  239.78,15.75 0 top
C606  0.1uF  [0402-CAP]  239.78,8.13 180 top
C607  0.1uF  [0402-CAP]  222,15.75 0 top
C608  4.7uF  [0402-CAP]  219.46,13.21 270 top
C609  4.7uF  [0402-CAP]  219.46,10.67 90 top
C610  4.7uF  [0402-CAP]  230.89,8.13 0 top
C611  0.22uF  [0402-CAP]  228.82,8.74 270 top
C612  0.1uF  [0402-CAP]  233.43,15.75 0 top
C613  0.1uF  [0402-CAP]  263.65,11.94 90 top
C614  0.1uF  [0402-CAP]  260.6,15.75 0 top
C615  2.2nF  [0402-CAP]  278.38,11.94 90 top
C616  0.1uF  [0402-CAP]  270.76,11.94 90 top
C617  10nF  [0402-CAP]  274.57,15.75 0 top
C618  0.1uF  [0402-CAP]  274.57,8.13 180 top
C619  0.1uF  [0402-CAP]  256.79,15.75 0 top
C620  4.7uF  [0402-CAP]  254.25,13.21 270 top
C621  4.7uF  [0402-CAP]  254.25,10.67 90 top
C622  4.7uF  [0402-CAP]  265.68,8.13 0 top
C623  0.22uF  [0402-CAP]  263.61,8.74 270 top
C624  0.1uF  [0402-CAP]  268.22,15.75 0 top
C625  0.1uF  [0402-CAP]  159.26,22.61 90 top
C626  0.1uF  [0402-CAP]  156.21,26.42 0 top
C627  2.2nF  [0402-CAP]  173.99,22.61 90 top
C628  0.1uF  [0402-CAP]  166.37,22.61 90 top
C629  10nF  [0402-CAP]  170.18,26.42 0 top
C630  0.1uF  [0402-CAP]  170.18,18.8 180 top
C631  0.1uF  [0402-CAP]  152.4,26.42 0 top
C632  4.7uF  [0402-CAP]  149.86,23.88 270 top
C633  4.7uF  [0402-CAP]  149.86,21.34 90 top
C634  4.7uF  [0402-CAP]  161.29,18.8 0 top
C635  0.22uF  [0402-CAP]  159.22,19.4 270 top
C636  0.1uF  [0402-CAP]  163.83,26.42 0 top
C637  0.1uF  [0402-CAP]  194.06,22.61 90 top
C638  0.1uF  [0402-CAP]  191.01,26.42 0 top
C639  2.2nF  [0402-CAP]  208.79,22.61 90 top
C640  0.1uF  [0402-CAP]  201.17,22.61 90 top
C641  10nF  [0402-CAP]  204.98,26.42 0 top
C642  0.1uF  [0402-CAP]  204.98,18.8 180 top
C643  0.1uF  [0402-CAP]  187.2,26.42 0 top
C644  4.7uF  [0402-CAP]  184.66,23.88 270 top
C645  4.7uF  [0402-CAP]  184.66,21.34 90 top
C646  4.7uF  [0402-CAP]  196.09,18.8 0 top
C647  0.22uF  [0402-CAP]  194.02,19.4 270 top
C648  0.1uF  [0402-CAP]  198.63,26.42 0 top
C649  0.1uF  [0402-CAP]  228.85,22.61 90 top
C650  0.1uF  [0402-CAP]  225.81,26.42 0 top
C651  2.2nF  [0402-CAP]  243.59,22.61 90 top
C652  0.1uF  [0402-CAP]  235.97,22.61 90 top
C653  10nF  [0402-CAP]  239.78,26.42 0 top
C654  0.1uF  [0402-CAP]  239.78,18.8 180 top
C655  0.1uF  [0402-CAP]  222,26.42 0 top
C656  4.7uF  [0402-CAP]  219.46,23.88 270 top
C657  4.7uF  [0402-CAP]  219.46,21.34 90 top
C658  4.7uF  [0402-CAP]  230.89,18.8 0 top
C659  0.22uF  [0402-CAP]  228.82,19.4 270 top
C660  0.1uF  [0402-CAP]  233.43,26.42 0 top
C661  0.1uF  [0402-CAP]  263.65,22.61 90 top
C662  0.1uF  [0402-CAP]  260.6,26.42 0 top
C663  2.2nF  [0402-CAP]  278.38,22.61 90 top
C664  0.1uF  [0402-CAP]  270.76,22.61 90 top
C665  10nF  [0402-CAP]  274.57,26.42 0 top
C666  0.1uF  [0402-CAP]  274.57,18.8 180 top
C667  0.1uF  [0402-CAP]  256.79,26.42 0 top
C668  4.7uF  [0402-CAP]  254.25,23.88 270 top
C669  4.7uF  [0402-CAP]  254.25,21.34 90 top
C670  4.7uF  [0402-CAP]  265.68,18.8 0 top
C671  0.22uF  [0402-CAP]  263.61,19.4 270 top
C672  0.1uF  [0402-CAP]  268.22,26.42 0 top
C673  0.1uF  [0402-CAP]  159.26,33.27 90 top
C674  0.1uF  [0402-CAP]  156.21,37.08 0 top
C675  2.2nF  [0402-CAP]  173.99,33.27 90 top
C676  0.1uF  [0402-CAP]  166.37,33.27 90 top
C677  10nF  [0402-CAP]  170.18,37.08 0 top
C678  0.1uF  [0402-CAP]  170.18,29.46 180 top
C679  0.1uF  [0402-CAP]  152.4,37.08 0 top
C680  4.7uF  [0402-CAP]  149.86,34.54 270 top
C681  4.7uF  [0402-CAP]  149.86,32 90 top
C682  4.7uF  [0402-CAP]  161.29,29.46 0 top
C683  0.22uF  [0402-CAP]  159.22,30.07 270 top
C684  0.1uF  [0402-CAP]  163.83,37.08 0 top
C685  0.1uF  [0402-CAP]  194.06,33.27 90 top
C686  0.1uF  [0402-CAP]  191.01,37.08 0 top
C687  2.2nF  [0402-CAP]  208.79,33.27 90 top
C688  0.1uF  [0402-CAP]  201.17,33.27 90 top
C689  10nF  [0402-CAP]  204.98,37.08 0 top
C690  0.1uF  [0402-CAP]  204.98,29.46 180 top
C691  0.1uF  [0402-CAP]  187.2,37.08 0 top
C692  4.7uF  [0402-CAP]  184.66,34.54 270 top
C693  4.7uF  [0402-CAP]  184.66,32 90 top
C694  4.7uF  [0402-CAP]  196.09,29.46 0 top
C695  0.22uF  [0402-CAP]  194.02,30.07 270 top
C696  0.1uF  [0402-CAP]  198.63,37.08 0 top
C697  0.1uF  [0402-CAP]  228.85,33.27 90 top
C698  0.1uF  [0402-CAP]  225.81,37.08 0 top
C699  2.2nF  [0402-CAP]  243.59,33.27 90 top
C700  0.1uF  [0402-CAP]  235.97,33.27 90 top
C701  10nF  [0402-CAP]  239.78,37.08 0 top
C702  0.1uF  [0402-CAP]  239.78,29.46 180 top
C703  0.1uF  [0402-CAP]  222,37.08 0 top
C704  4.7uF  [0402-CAP]  219.46,34.54 270 top
C705  4.7uF  [0402-CAP]  219.46,32 90 top
C706  4.7uF  [0402-CAP]  230.89,29.46 0 top
C707  0.22uF  [0402-CAP]  228.82,30.07 270 top
C708  0.1uF  [0402-CAP]  233.43,37.08 0 top
C709  0.1uF  [0402-CAP]  263.65,33.27 90 top
C710  0.1uF  [0402-CAP]  260.6,37.08 0 top
C711  2.2nF  [0402-CAP]  278.38,33.27 90 top
C712  0.1uF  [0402-CAP]  270.76,33.27 90 top
C713  10nF  [0402-CAP]  274.57,37.08 0 top
C714  0.1uF  [0402-CAP]  274.57,29.46 180 top
C715  0.1uF  [0402-CAP]  256.79,37.08 0 top
C716  4.7uF  [0402-CAP]  254.25,34.54 270 top
C717  4.7uF  [0402-CAP]  254.25,32 90 top
C718  4.7uF  [0402-CAP]  265.68,29.46 0 top
C719  0.22uF  [0402-CAP]  263.61,30.07 270 top
C720  0.1uF  [0402-CAP]  268.22,37.08 0 top
C721  0.1uF  [0402-CAP]  159.26,43.94 90 top
C722  0.1uF  [0402-CAP]  156.21,47.75 0 top
C723  2.2nF  [0402-CAP]  173.99,43.94 90 top
C724  0.1uF  [0402-CAP]  166.37,43.94 90 top
C725  10nF  [0402-CAP]  170.18,47.75 0 top
C726  0.1uF  [0402-CAP]  170.18,40.13 180 top
C727  0.1uF  [0402-CAP]  152.4,47.75 0 top
C728  4.7uF  [0402-CAP]  149.86,45.21 270 top
C729  4.7uF  [0402-CAP]  149.86,42.67 90 top
C730  4.7uF  [0402-CAP]  161.29,40.13 0 top
C731  0.22uF  [0402-CAP]  159.22,40.74 270 top
C732  0.1uF  [0402-CAP]  163.83,47.75 0 top
C733  0.1uF  [0402-CAP]  194.06,43.94 90 top
C734  0.1uF  [0402-CAP]  191.01,47.75 0 top
C735  2.2nF  [0402-CAP]  208.79,43.94 90 top
C736  0.1uF  [0402-CAP]  201.17,43.94 90 top
C737  10nF  [0402-CAP]  204.98,47.75 0 top
C738  0.1uF  [0402-CAP]  204.98,40.13 180 top
C739  0.1uF  [0402-CAP]  187.2,47.75 0 top
C740  4.7uF  [0402-CAP]  184.66,45.21 270 top
C741  4.7uF  [0402-CAP]  184.66,42.67 90 top
C742  4.7uF  [0402-CAP]  196.09,40.13 0 top
C743  0.22uF  [0402-CAP]  194.02,40.74 270 top
C744  0.1uF  [0402-CAP]  198.63,47.75 0 top
C745  0.1uF  [0402-CAP]  228.85,43.94 90 top
C746  0.1uF  [0402-CAP]  225.81,47.75 0 top
C747  2.2nF  [0402-CAP]  243.59,43.94 90 top
C748  0.1uF  [0402-CAP]  235.97,43.94 90 top
C749  10nF  [0402-CAP]  239.78,47.75 0 top
C750  0.1uF  [0402-CAP]  239.78,40.13 180 top
C751  0.1uF  [0402-CAP]  222,47.75 0 top
C752  4.7uF  [0402-CAP]  219.46,45.21 270 top
C753  4.7uF  [0402-CAP]  219.46,42.67 90 top
C754  4.7uF  [0402-CAP]  230.89,40.13 0 top
C755  0.22uF  [0402-CAP]  228.82,40.74 270 top
C756  0.1uF  [0402-CAP]  233.43,47.75 0 top
C757  0.1uF  [0402-CAP]  263.65,43.94 90 top
C758  0.1uF  [0402-CAP]  260.6,47.75 0 top
C759  2.2nF  [0402-CAP]  278.38,43.94 90 top
C760  0.1uF  [0402-CAP]  270.76,43.94 90 top
C761  10nF  [0402-CAP]  274.57,47.75 0 top
C762  0.1uF  [0402-CAP]  274.57,40.13 180 top
C763  0.1uF  [0402-CAP]  256.79,47.75 0 top
C764  4.7uF  [0402-CAP]  254.25,45.21 270 top
C765  4.7uF  [0402-CAP]  254.25,42.67 90 top
C766  4.7uF  [0402-CAP]  265.68,40.13 0 top
C767  0.22uF  [0402-CAP]  263.61,40.74 270 top
C768  0.1uF  [0402-CAP]  268.22,47.75 0 top
C769  0.1uF  [0402-CAP]  159.26,54.61 90 top
C770  0.1uF  [0402-CAP]  156.21,58.42 0 top
C771  2.2nF  [0402-CAP]  173.99,54.61 90 top
C772  0.1uF  [0402-CAP]  166.37,54.61 90 top
C773  10nF  [0402-CAP]  170.18,58.42 0 top
C774  0.1uF  [0402-CAP]  170.18,50.8 180 top
C775  0.1uF  [0402-CAP]  152.4,58.42 0 top
C776  4.7uF  [0402-CAP]  149.86,55.88 270 top
C777  4.7uF  [0402-CAP]  149.86,53.34 90 top
C778  4.7uF  [0402-CAP]  161.29,50.8 0 top
C779  0.22uF  [0402-CAP]  159.22,51.41 270 top
C780  0.1uF  [0402-CAP]  163.83,58.42 0 top
C781  0.1uF  [0402-CAP]  194.06,54.61 90 top
C782  0.1uF  [0402-CAP]  191.01,58.42 0 top
C783  2.2nF  [0402-CAP]  208.79,54.61 90 top
C784  0.1uF  [0402-CAP]  201.17,54.61 90 top
C785  10nF  [0402-CAP]  204.98,58.42 0 top
C786  0.1uF  [0402-CAP]  204.98,50.8 180 top
C787  0.1uF  [0402-CAP]  187.2,58.42 0 top
C788  4.7uF  [0402-CAP]  184.66,55.88 270 top
C789  4.7uF  [0402-CAP]  184.66,53.34 90 top
C790  4.7uF  [0402-CAP]  196.09,50.8 0 top
C791  0.22uF  [0402-CAP]  194.02,51.41 270 top
C792  0.1uF  [0402-CAP]  198.63,58.42 0 top
C793  0.1uF  [0402-CAP]  228.85,54.61 90 top
C794  0.1uF  [0402-CAP]  225.81,58.42 0 top
C795  2.2nF  [0402-CAP]  243.59,54.61 90 top
C796  0.1uF  [0402-CAP]  235.97,54.61 90 top
C797  10nF  [0402-CAP]  239.78,58.42 0 top
C798  0.1uF  [0402-CAP]  239.78,50.8 180 top
C799  0.1uF  [0402-CAP]  222,58.42 0 top
C800  4.7uF  [0402-CAP]  219.46,55.88 270 top
C801  4.7uF  [0402-CAP]  219.46,53.34 90 top
C802  4.7uF  [0402-CAP]  230.89,50.8 0 top
C803  0.22uF  [0402-CAP]  228.82,51.41 270 top
C804  0.1uF  [0402-CAP]  233.43,58.42 0 top
C805  0.1uF  [0402-CAP]  263.65,54.61 90 top
C806  0.1uF  [0402-CAP]  260.6,58.42 0 top
C807  2.2nF  [0402-CAP]  278.38,54.61 90 top
C808  0.1uF  [0402-CAP]  270.76,54.61 90 top
C809  10nF  [0402-CAP]  274.57,58.42 0 top
C810  0.1uF  [0402-CAP]  274.57,50.8 180 top
C811  0.1uF  [0402-CAP]  256.79,58.42 0 top
C812  4.7uF  [0402-CAP]  254.25,55.88 270 top
C813  4.7uF  [0402-CAP]  254.25,53.34 90 top
C814  4.7uF  [0402-CAP]  265.68,50.8 0 top
C815  0.22uF  [0402-CAP]  263.61,51.41 270 top
C816  0.1uF  [0402-CAP]  268.22,58.42 0 top
C817  0.1uF  [0402-CAP]  159.26,65.28 90 top
C818  0.1uF  [0402-CAP]  156.21,69.09 0 top
C819  2.2nF  [0402-CAP]  173.99,65.28 90 top
C820  0.1uF  [0402-CAP]  166.37,65.28 90 top
C821  10nF  [0402-CAP]  170.18,69.09 0 top
C822  0.1uF  [0402-CAP]  170.18,61.47 180 top
C823  0.1uF  [0402-CAP]  152.4,69.09 0 top
C824  4.7uF  [0402-CAP]  149.86,66.55 270 top
C825  4.7uF  [0402-CAP]  149.86,64.01 90 top
C826  4.7uF  [0402-CAP]  161.29,61.47 0 top
C827  0.22uF  [0402-CAP]  159.22,62.08 270 top
C828  0.1uF  [0402-CAP]  163.83,69.09 0 top
C829  0.1uF  [0402-CAP]  194.06,65.28 90 top
C830  0.1uF  [0402-CAP]  191.01,69.09 0 top
C831  2.2nF  [0402-CAP]  208.79,65.28 90 top
C832  0.1uF  [0402-CAP]  201.17,65.28 90 top
C833  10nF  [0402-CAP]  204.98,69.09 0 top
C834  0.1uF  [0402-CAP]  204.98,61.47 180 top
C835  0.1uF  [0402-CAP]  187.2,69.09 0 top
C836  4.7uF  [0402-CAP]  184.66,66.55 270 top
C837  4.7uF  [0402-CAP]  184.66,64.01 90 top
C838  4.7uF  [0402-CAP]  196.09,61.47 0 top
C839  0.22uF  [0402-CAP]  194.02,62.08 270 top
C840  0.1uF  [0402-CAP]  198.63,69.09 0 top
C841  0.1uF  [0402-CAP]  228.85,65.28 90 top
C842  0.1uF  [0402-CAP]  225.81,69.09 0 top
C843  2.2nF  [0402-CAP]  243.59,65.28 90 top
C844  0.1uF  [0402-CAP]  235.97,65.28 90 top
C845  10nF  [0402-CAP]  239.78,69.09 0 top
C846  0.1uF  [0402-CAP]  239.78,61.47 180 top
C847  0.1uF  [0402-CAP]  222,69.09 0 top
C848  4.7uF  [0402-CAP]  219.46,66.55 270 top
C849  4.7uF  [0402-CAP]  219.46,64.01 90 top
C850  4.7uF  [0402-CAP]  230.89,61.47 0 top
C851  0.22uF  [0402-CAP]  228.82,62.08 270 top
C852  0.1uF  [0402-CAP]  233.43,69.09 0 top
C853  0.1uF  [0402-CAP]  263.65,65.28 90 top
C854  0.1uF  [0402-CAP]  260.6,69.09 0 top
C855  2.2nF  [0402-CAP]  278.38,65.28 90 top
C856  0.1uF  [0402-CAP]  270.76,65.28 90 top
C857  10nF  [0402-CAP]  274.57,69.09 0 top
C858  0.1uF  [0402-CAP]  274.57,61.47 180 top
C859  0.1uF  [0402-CAP]  256.79,69.09 0 top
C860  4.7uF  [0402-CAP]  254.25,66.55 270 top
C861  4.7uF  [0402-CAP]  254.25,64.01 90 top
C862  4.7uF  [0402-CAP]  265.68,61.47 0 top
C863  0.22uF  [0402-CAP]  263.61,62.08 270 top
C864  0.1uF  [0402-CAP]  268.22,69.09 0 top
C865  0.1uF  [0402-CAP]  159.26,75.95 90 top
C866  0.1uF  [0402-CAP]  156.21,79.76 0 top
C867  2.2nF  [0402-CAP]  173.99,75.95 90 top
C868  0.1uF  [0402-CAP]  166.37,75.95 90 top
C869  10nF  [0402-CAP]  170.18,79.76 0 top
C870  0.1uF  [0402-CAP]  170.18,72.14 180 top
C871  0.1uF  [0402-CAP]  152.4,79.76 0 top
C872  4.7uF  [0402-CAP]  149.86,77.22 270 top
C873  4.7uF  [0402-CAP]  149.86,74.68 90 top
C874  4.7uF  [0402-CAP]  161.29,72.14 0 top
C875  0.22uF  [0402-CAP]  159.22,72.74 270 top
C876  0.1uF  [0402-CAP]  163.83,79.76 0 top
C877  0.1uF  [0402-CAP]  194.06,75.95 90 top
C878  0.1uF  [0402-CAP]  191.01,79.76 0 top
C879  2.2nF  [0402-CAP]  208.79,75.95 90 top
C880  0.1uF  [0402-CAP]  201.17,75.95 90 top
C881  10nF  [0402-CAP]  204.98,79.76 0 top
C882  0.1uF  [0402-CAP]  204.98,72.14 180 top
C883  0.1uF  [0402-CAP]  187.2,79.76 0 top
C884  4.7uF  [0402-CAP]  184.66,77.22 270 top
C885  4.7uF  [0402-CAP]  184.66,74.68 90 top
C886  4.7uF  [0402-CAP]  196.09,72.14 0 top
C887  0.22uF  [0402-CAP]  194.02,72.74 270 top
C888  0.1uF  [0402-CAP]  198.63,79.76 0 top
C889  0.1uF  [0402-CAP]  228.85,75.95 90 top
C890  0.1uF  [0402-CAP]  225.81,79.76 0 top
C891  2.2nF  [0402-CAP]  243.59,75.95 90 top
C892  0.1uF  [0402-CAP]  235.97,75.95 90 top
C893  10nF  [0402-CAP]  239.78,79.76 0 top
C894  0.1uF  [0402-CAP]  239.78,72.14 180 top
C895  0.1uF  [0402-CAP]  222,79.76 0 top
C896  4.7uF  [0402-CAP]  219.46,77.22 270 top
C897  4.7uF  [0402-CAP]  219.46,74.68 90 top
C898  4.7uF  [0402-CAP]  230.89,72.14 0 top
C899  0.22uF  [0402-CAP]  228.82,72.74 270 top
C900  0.1uF  [0402-CAP]  233.43,79.76 0 top
C901  0.1uF  [0402-CAP]  263.65,75.95 90 top
C902  0.1uF  [0402-CAP]  260.6,79.76 0 top
C903  2.2nF  [0402-CAP]  278.38,75.95 90 top
C904  0.1uF  [0402-CAP]  270.76,75.95 90 top
C905  10nF  [0402-CAP]  274.57,79.76 0 top
C906  0.1uF  [0402-CAP]  274.57,72.14 180 top
C907  0.1uF  [0402-CAP]  256.79,79.76 0 top
C908  4.7uF  [0402-CAP]  254.25,77.22 270 top
C909  4.7uF  [0402-CAP]  254.25,74.68 90 top
C910  4.7uF  [0402-CAP]  265.68,72.14 0 top
C911  0.22uF  [0402-CAP]  263.61,72.74 270 top
C912  0.1uF  [0402-CAP]  268.22,79.76 0 top
C913  0.1uF  [0402-CAP]  159.26,86.61 90 top
C914  0.1uF  [0402-CAP]  156.21,90.42 0 top
C915  2.2nF  [0402-CAP]  173.99,86.61 90 top
C916  0.1uF  [0402-CAP]  166.37,86.61 90 top
C917  10nF  [0402-CAP]  170.18,90.42 0 top
C918  0.1uF  [0402-CAP]  170.18,82.8 180 top
C919  0.1uF  [0402-CAP]  152.4,90.42 0 top
C920  4.7uF  [0402-CAP]  149.86,87.88 270 top
C921  4.7uF  [0402-CAP]  149.86,85.34 90 top
C922  4.7uF  [0402-CAP]  161.29,82.8 0 top
C923  0.22uF  [0402-CAP]  159.22,83.41 270 top
C924  0.1uF  [0402-CAP]  163.83,90.42 0 top
C925  0.1uF  [0402-CAP]  194.06,86.61 90 top
C926  0.1uF  [0402-CAP]  191.01,90.42 0 top
C927  2.2nF  [0402-CAP]  208.79,86.61 90 top
C928  0.1uF  [0402-CAP]  201.17,86.61 90 top
C929  10nF  [0402-CAP]  204.98,90.42 0 top
C930  0.1uF  [0402-CAP]  204.98,82.8 180 top
C931  0.1uF  [0402-CAP]  187.2,90.42 0 top
C932  4.7uF  [0402-CAP]  184.66,87.88 270 top
C933  4.7uF  [0402-CAP]  184.66,85.34 90 top
C934  4.7uF  [0402-CAP]  196.09,82.8 0 top
C935  0.22uF  [0402-CAP]  194.02,83.41 270 top
C936  0.1uF  [0402-CAP]  198.63,90.42 0 top
C937  0.1uF  [0402-CAP]  228.85,86.61 90 top
C938  0.1uF  [0402-CAP]  225.81,90.42 0 top
C939  2.2nF  [0402-CAP]  243.59,86.61 90 top
C940  0.1uF  [0402-CAP]  235.97,86.61 90 top
C941  10nF  [0402-CAP]  239.78,90.42 0 top
C942  0.1uF  [0402-CAP]  239.78,82.8 180 top
C943  0.1uF  [0402-CAP]  222,90.42 0 top
C944  4.7uF  [0402-CAP]  219.46,87.88 270 top
C945  4.7uF  [0402-CAP]  219.46,85.34 90 top
C946  4.7uF  [0402-CAP]  230.89,82.8 0 top
C947  0.22uF  [0402-CAP]  228.82,83.41 270 top
C948  0.1uF  [0402-CAP]  233.43,90.42 0 top
C949  0.1uF  [0402-CAP]  263.65,86.61 90 top
C950  0.1uF  [0402-CAP]  260.6,90.42 0 top
C951  2.2nF  [0402-CAP]  278.38,86.61 90 top
C952  0.1uF  [0402-CAP]  270.76,86.61 90 top
C953  10nF  [0402-CAP]  274.57,90.42 0 top
C954  0.1uF  [0402-CAP]  274.57,82.8 180 top
C955  0.1uF  [0402-CAP]  256.79,90.42 0 top
C956  4.7uF  [0402-CAP]  254.25,87.88 270 top
C957  4.7uF  [0402-CAP]  254.25,85.34 90 top
C958  4.7uF  [0402-CAP]  265.68,82.8 0 top
C959  0.22uF  [0402-CAP]  263.61,83.41 270 top
C960  0.1uF  [0402-CAP]  268.22,90.42 0 top
C961  0.1uF  [0402-CAP]  159.26,97.28 90 top
C962  0.1uF  [0402-CAP]  156.21,101.09 0 top
C963  2.2nF  [0402-CAP]  173.99,97.28 90 top
C964  0.1uF  [0402-CAP]  166.37,97.28 90 top
C965  10nF  [0402-CAP]  170.18,101.09 0 top
C966  0.1uF  [0402-CAP]  170.18,93.47 180 top
C967  0.1uF  [0402-CAP]  152.4,101.09 0 top
C968  4.7uF  [0402-CAP]  149.86,98.55 270 top
C969  4.7uF  [0402-CAP]  149.86,96.01 90 top
C970  4.7uF  [0402-CAP]  161.29,93.47 0 top
C971  0.22uF  [0402-CAP]  159.22,94.08 270 top
C972  0.1uF  [0402-CAP]  163.83,101.09 0 top
C973  0.1uF  [0402-CAP]  194.06,97.28 90 top
C974  0.1uF  [0402-CAP]  191.01,101.09 0 top
C975  2.2nF  [0402-CAP]  208.79,97.28 90 top
C976  0.1uF  [0402-CAP]  201.17,97.28 90 top
C977  10nF  [0402-CAP]  204.98,101.09 0 top
C978  0.1uF  [0402-CAP]  204.98,93.47 180 top
C979  0.1uF  [0402-CAP]  187.2,101.09 0 top
C980  4.7uF  [0402-CAP]  184.66,98.55 270 top
C981  4.7uF  [0402-CAP]  184.66,96.01 90 top
C982  4.7uF  [0402-CAP]  196.09,93.47 0 top
C983  0.22uF  [0402-CAP]  194.02,94.08 270 top
C984  0.1uF  [0402-CAP]  198.63,101.09 0 top
C985  0.1uF  [0402-CAP]  228.85,97.28 90 top
C986  0.1uF  [0402-CAP]  225.81,101.09 0 top
C987  2.2nF  [0402-CAP]  243.59,97.28 90 top
C988  0.1uF  [0402-CAP]  235.97,97.28 90 top
C989  10nF  [0402-CAP]  239.78,101.09 0 top
C990  0.1uF  [0402-CAP]  239.78,93.47 180 top
C991  0.1uF  [0402-CAP]  222,101.09 0 top
C992  4.7uF  [0402-CAP]  219.46,98.55 270 top
C993  4.7uF  [0402-CAP]  219.46,96.01 90 top
C994  4.7uF  [0402-CAP]  230.89,93.47 0 top
C995  0.22uF  [0402-CAP]  228.82,94.08 270 top
C996  0.1uF  [0402-CAP]  233.43,101.09 0 top
C997  0.1uF  [0402-CAP]  263.65,97.28 90 top
C998  0.1uF  [0402-CAP]  260.6,101.09 0 top
C999  2.2nF  [0402-CAP]  278.38,97.28 90 top
C1000  0.1uF  [0402-CAP]  270.76,97.28 90 top
C1001  10nF  [0402-CAP]  274.57,101.09 0 top
C1002  0.1uF  [0402-CAP]  274.57,93.47 180 top
C1003  0.1uF  [0402-CAP]  256.79,101.09 0 top
C1004  4.7uF  [0402-CAP]  254.25,98.55 270 top
C1005  4.7uF  [0402-CAP]  254.25,96.01 90 top
C1006  4.7uF  [0402-CAP]  265.68,93.47 0 top
C1007  0.22uF  [0402-CAP]  263.61,94.08 270 top
C1008  0.1uF  [0402-CAP]  268.22,101.09 0 top
C1009  0.1uF  [0402-CAP]  159.26,107.95 90 top
C1010  0.1uF  [0402-CAP]  156.21,111.76 0 top
C1011  2.2nF  [0402-CAP]  173.99,107.95 90 top
C1012  0.1uF  [0402-CAP]  166.37,107.95 90 top
C1013  10nF  [0402-CAP]  170.18,111.76 0 top
C1014  0.1uF  [0402-CAP]  170.18,104.14 180 top
C1015  0.1uF  [0402-CAP]  152.4,111.76 0 top
C1016  4.7uF  [0402-CAP]  149.86,109.22 270 top
C1017  4.7uF  [0402-CAP]  149.86,106.68 90 top
C1018  4.7uF  [0402-CAP]  161.29,104.14 0 top
C1019  0.22uF  [0402-CAP]  159.22,104.75 270 top
C1020  0.1uF  [0402-CAP]  163.83,111.76 0 top
C1021  0.1uF  [0402-CAP]  194.06,107.95 90 top
C1022  0.1uF  [0402-CAP]  191.01,111.76 0 top
C1023  2.2nF  [0402-CAP]  208.79,107.95 90 top
C1024  0.1uF  [0402-CAP]  201.17,107.95 90 top
C1025  10nF  [0402-CAP]  204.98,111.76 0 top
C1026  0.1uF  [0402-CAP]  204.98,104.14 180 top
C1027  0.1uF  [0402-CAP]  187.2,111.76 0 top
C1028  4.7uF  [0402-CAP]  184.66,109.22 270 top
C1029  4.7uF  [0402-CAP]  184.66,106.68 90 top
C1030  4.7uF  [0402-CAP]  196.09,104.14 0 top
C1031  0.22uF  [0402-CAP]  194.02,104.75 270 top
C1032  0.1uF  [0402-CAP]  198.63,111.76 0 top
C1033  0.1uF  [0402-CAP]  228.85,107.95 90 top
C1034  0.1uF  [0402-CAP]  225.81,111.76 0 top
C1035  2.2nF  [0402-CAP]  243.59,107.95 90 top
C1036  0.1uF  [0402-CAP]  235.97,107.95 90 top
C1037  10nF  [0402-CAP]  239.78,111.76 0 top
C1038  0.1uF  [0402-CAP]  239.78,104.14 180 top
C1039  0.1uF  [0402-CAP]  222,111.76 0 top
C1040  4.7uF  [0402-CAP]  219.46,109.22 270 top
C1041  4.7uF  [0402-CAP]  219.46,106.68 90 top
C1042  4.7uF  [0402-CAP]  230.89,104.14 0 top
C1043  0.22uF  [0402-CAP]  228.82,104.75 270 top
C1044  0.1uF  [0402-CAP]  233.43,111.76 0 top
C1045  0.1uF  [0402-CAP]  263.65,107.95 90 top
C1046  0.1uF  [0402-CAP]  260.6,111.76 0 top
C1047  2.2nF  [0402-CAP]  278.38,107.95 90 top
C1048  0.1uF  [0402-CAP]  270.76,107.95 90 top
C1049  10nF  [0402-CAP]  274.57,111.76 0 top
C1050  0.1uF  [0402-CAP]  274.57,104.14 180 top
C1051  0.1uF  [0402-CAP]  256.79,111.76 0 top
C1052  4.7uF  [0402-CAP]  254.25,109.22 270 top
C1053  4.7uF  [0402-CAP]  254.25,106.68 90 top
C1054  4.7uF  [0402-CAP]  265.68,104.14 0 top
C1055  0.22uF  [0402-CAP]  263.61,104.75 270 top
C1056  0.1uF  [0402-CAP]  268.22,111.76 0 top
C1057  0.1uF  [0402-CAP]  159.26,118.62 90 top
C1058  0.1uF  [0402-CAP]  156.21,122.43 0 top
C1059  2.2nF  [0402-CAP]  173.99,118.62 90 top
C1060  0.1uF  [0402-CAP]  166.37,118.62 90 top
C1061  10nF  [0402-CAP]  170.18,122.43 0 top
C1062  0.1uF  [0402-CAP]  170.18,114.81 180 top
C1063  0.1uF  [0402-CAP]  152.4,122.43 0 top